# EAGLE board 24dc_cup_wash_sucction - Copyv7.7 (EAGLE 7.7.0)
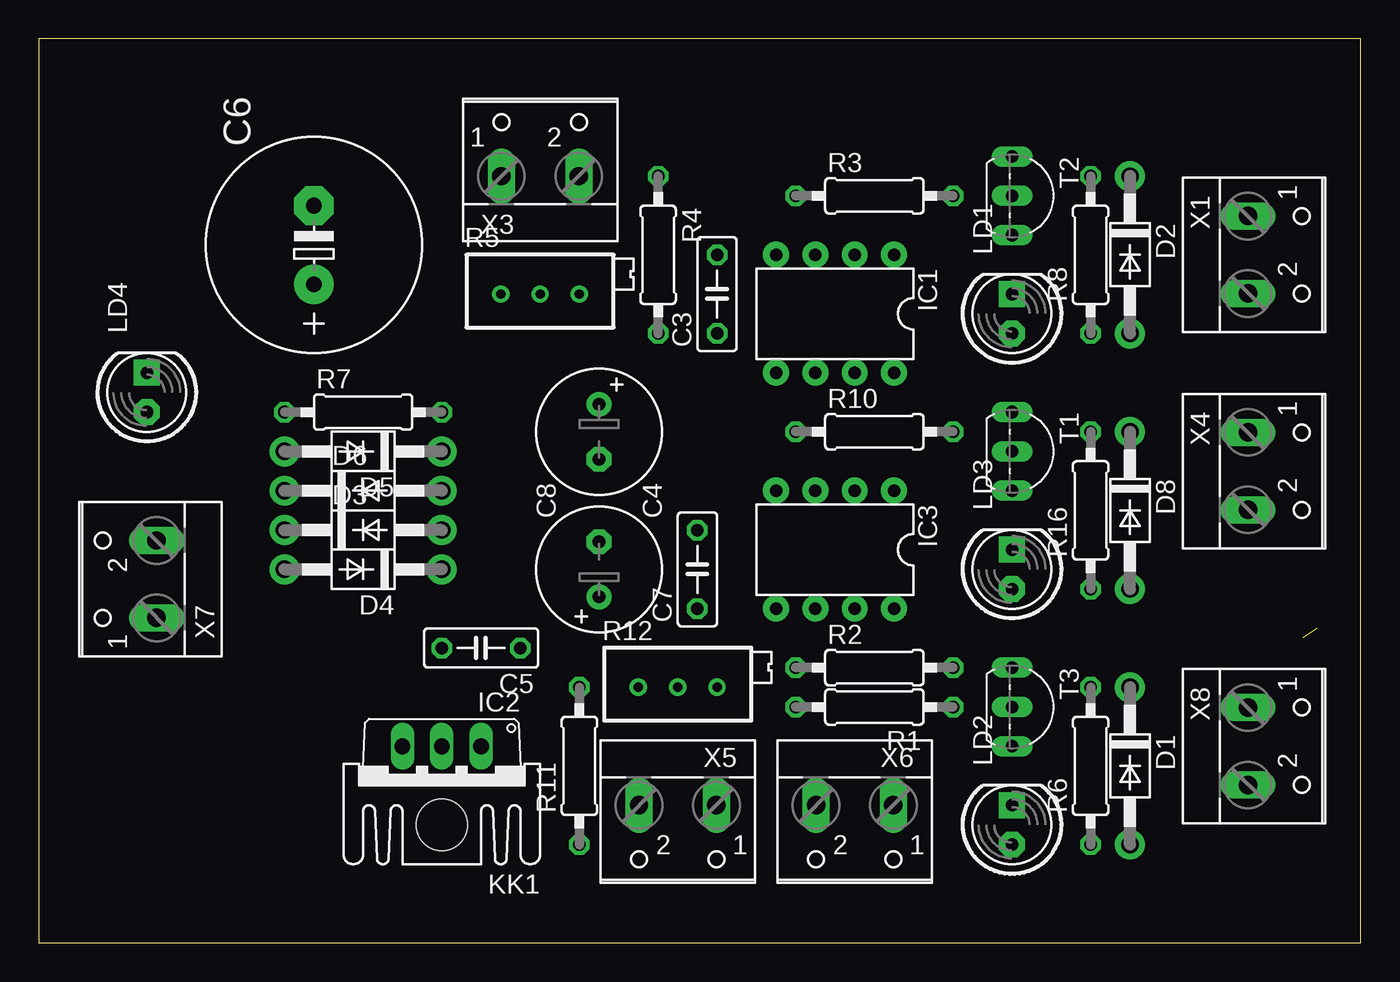
[diagram p0: board, top side]
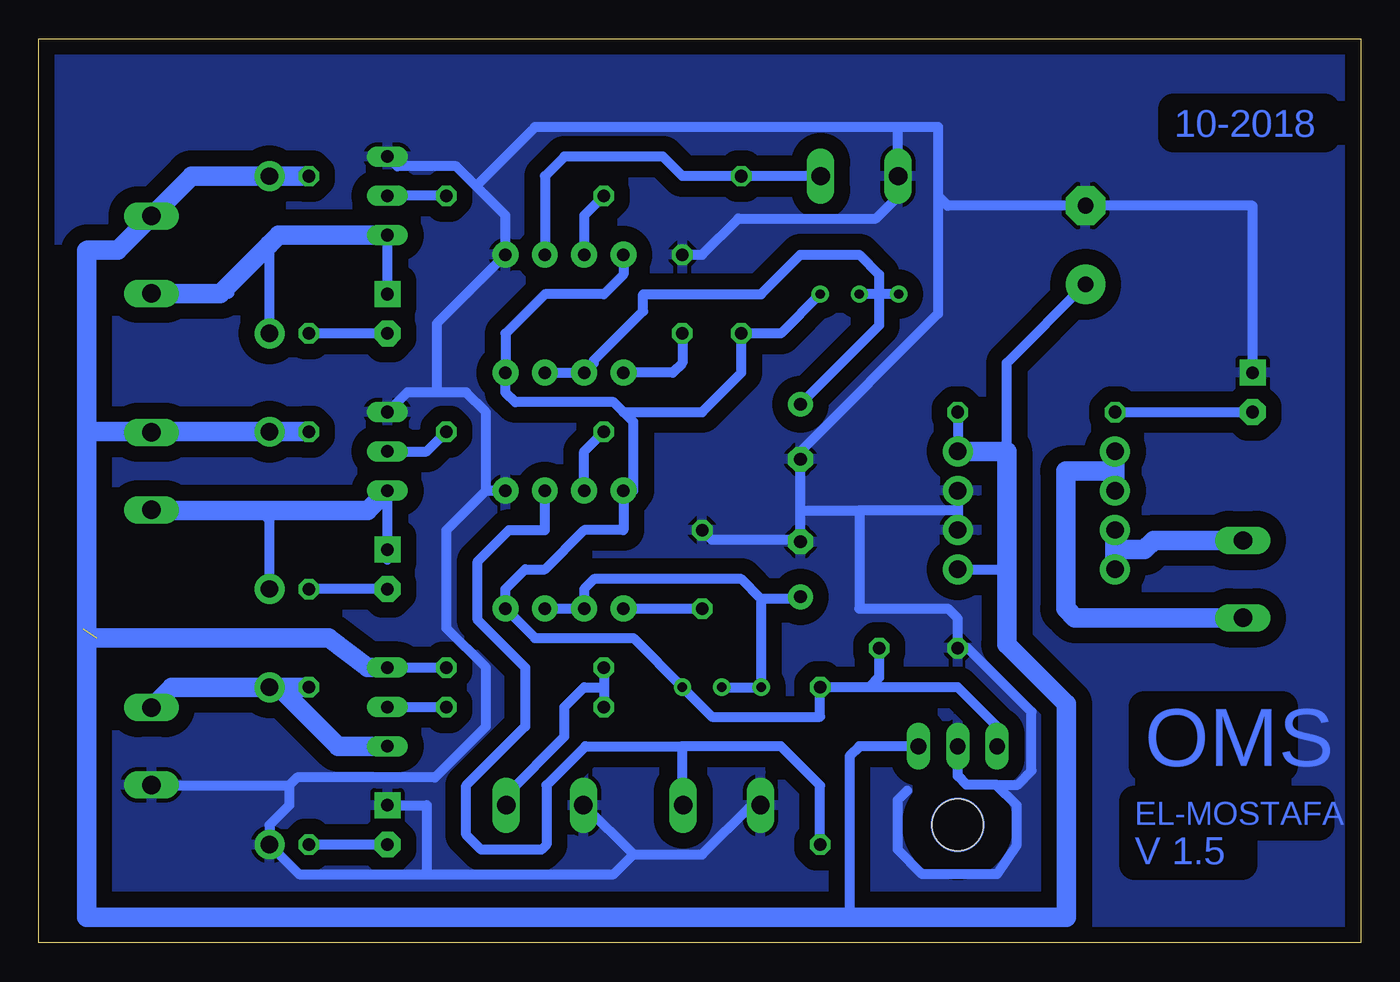
[diagram p1: board, bottom side, seen from below]

Size 85.39 x 58.41 mm. Coordinates in mm from the lower left corner, seen from the top.
Outline: 0,0 85.39,0 85.39,58.41 0,58.41 0,0
Copper layers (1*16): Top 0.035mm / dielectric 1.5mm / Bottom 0.035mm
Design rules "default *": minimum track width 25mil, minimum drill 0.35mm, track to track 40mil, track to pad 40mil, pad to pad 6mil, via to via 6mil, smd to smd 6mil, copper to edge 40mil, drill to drill 6mil, minimum pad ring 10mil, minimum via ring 8mil, stop-mask expansion 4mil, vias tented up to drill 0mil, thermal gap 10mil

## Footprints (pad centres in the part's own frame; a part is rotated, then mirrored left to right if it is on the bottom)
C050-025X075 = drill 0.813 octagon: 1 -2.54,0; 2 2.54,0
E3,5-8 = drill 0.813 pad 1.6: + -1.778,0 | drill 0.813 pad 1.6 octagon: - 1.778,0
E5-13 = drill 1.016 pad 2.54: + -2.54,0 | drill 1.016 pad 2.54 octagon: - 2.54,0
DO41-10 = drill 1.118 pad 1.93: A 5.08,0; C -5.08,0
DIL08-ROUND = drill 0.813 pad 1.676: 1 -3.81,-3.81; 2 -1.27,-3.81; 3 1.27,-3.81; 4 3.81,-3.81; 5 3.81,3.81; 6 1.27,3.81; 7 -1.27,3.81; 8 -3.81,3.81
TO220V = drill 1.016 long: 1 -2.54,-2.54; 2 0,-2.54; 3 2.54,-2.54
SK95-2M3 = hole 3.302: 0,2.54
LED5MM = drill 0.813 pad 1.676 octagon: A -1.27,0 | drill 0.813 pad 1.676 square: K 1.27,0
0207/10 = drill 0.813 octagon: 1 -5.08,0; 2 5.08,0
RTRIMT93XA = drill 0.61: 1 0,-2.54; 2 0,0; 3 0,2.54
TO92-EBC-OVAL = drill 0.813 long: B 0,-1.27; C 2.54,-1.27; E -2.54,-1.27
TO92-EBC = drill 0.813 long: B 0,-1.27; C 2.54,-1.27; E -2.54,-1.27
W237-102 = drill 1.194 long: 1 -2.5,-1.27; 2 2.5,-1.27

## Placement (x,y rotation side)
C3  100nF  [C050-025X075]  43.81,41.91 90 top
C4  100uF  [E3,5-8]  36.2,33.02 270 top
C5  100nF  [C050-025X075]  28.57,19.05 180 top
C6  1000uF 50v  [E5-13]  17.78,45.09 90 top
C7  100nF  [C050-025X075]  42.55,24.13 90 top
C8  100uF  [E3,5-8]  36.2,24.13 90 top
D1  1N5817  [DO41-10]  70.48,11.43 270 top
D2  1N5817  [DO41-10]  70.48,44.45 270 top
D3  1N4007  [DO41-10]  20.95,26.67 0 top
D4  1N4007  [DO41-10]  20.95,24.13 180 top
D5  1N4007  [DO41-10]  20.95,31.75 180 top
D6  1N4007  [DO41-10]  20.95,29.21 0 top
D8  1N5817  [DO41-10]  70.48,27.94 270 top
IC1  NE555N  [DIL08-ROUND]  51.44,40.64 180 top
IC2  7812TV  [TO220V]  26.04,10.16 180 top
IC3  NE555N  [DIL08-ROUND]  51.44,25.4 180 top
KK1  SK95-2M3  [SK95-2M3]  26.04,10.16 180 top
LD1  [LED5MM]  62.87,40.64 90 top
LD2  [LED5MM]  62.87,7.62 90 top
LD3  [LED5MM]  62.87,24.13 90 top
LD4  [LED5MM]  6.99,35.56 90 top
R1  2.2k  [0207/10]  53.98,15.24 180 top
R2  10K  [0207/10]  53.98,17.78 0 top
R3  2.2k  [0207/10]  53.98,48.26 0 top
R4  10K  [0207/10]  40.01,44.45 270 top
R5  100k  [RTRIMT93XA]  32.38,41.91 270 top
R6  10k  [0207/10]  67.94,11.43 90 top
R7  10k  [0207/10]  20.95,34.29 0 top
R8  10k  [0207/10]  67.94,44.45 90 top
R10  2.2k  [0207/10]  53.98,33.02 0 top
R11  10K  [0207/10]  34.92,11.43 90 top
R12  100k  [RTRIMT93XA]  41.27,16.51 270 top
R16  10k  [0207/10]  67.94,27.94 90 top
T1  2N5551  [TO92-EBC-OVAL]  64.14,31.75 270 top
T2  2N5551  [TO92-EBC-OVAL]  64.14,48.26 270 top
T3  2N5401  [TO92-EBC]  64.14,15.24 270 top
X1  [W237-102]  79.38,44.45 270 top
X3  [W237-102]  32.38,50.8 0 top
X4  [W237-102]  79.38,30.48 270 top
X5  [W237-102]  41.27,7.62 180 top
X6  [W237-102]  52.7,7.62 180 top
X7  [W237-102]  6.35,23.5 90 top
X8  [W237-102]  79.38,12.7 270 top

## Library data of the parts
C3-C8 = rcl; SPICEPREFIX: C
D1 D2 D8 T1 T2 = adafruit
D3-D6 IC1 IC3 = adafruit@1
IC2 = linear
KK1 = heatsink
LD1-LD4 = led
R1-R4 R6-R8 R10 R11 R16 = rcl-2
R5 R12 = rcl; SPICEMODEL: X; SPICEPREFIXL: POT
T3 = transistor-neu-to92
X1 X3-X8 = con-wago-500

## Nets
12VDC: C5.1 IC1.4 IC1.8 IC2.3 IC3.4 IC3.8 R4.2 R5.3 R11.2 R12.3
12VDC_IN: C6.+ D2.C D4.C D5.C D8.C IC2.1 R2.2 R7.2 R8.2 R16.2 T3.E X1.1 X4.1
AC1-24: D5.A D6.C X7.1
AC2-24: D3.C D4.A X7.2
CUP: IC1.2 R4.1 X3.2
GND: C3.2 C4.- C5.2 C6.- C7.2 C8.- D1.A D3.A D6.A IC1.1 IC2.2 IC3.1 LD2.K LD4.K T1.E T2.E X3.1 X5.2 X6.2 X8.2
N$1: R3.2 T2.B
N$2: C3.1 IC1.5
N$3: D2.A LD1.K T2.C X1.2
N$5: C7.1 IC3.5
N$6: LD1.A R8.1
N$7: R1.1 T3.B
N$8: LD4.A R7.1
N$9: LD2.A R6.1
N$11: D8.A LD3.K T1.C X4.2
N$12: R10.2 T1.B
N$14: LD3.A R16.1
NS1: D1.C R6.2 T3.C X8.1
OUT_CUP: IC1.3 R3.1
OUT_WASH: IC3.3 R10.1
S_CUP: C4.+ IC1.6 IC1.7 R5.1 R5.2
S_WASH: C8.+ IC3.6 IC3.7 R12.1 R12.2
SUC: R1.2 R2.1 X6.1
WASH: IC3.2 R11.1 X5.1

## Tracks (layer width: path | path; a pad name or v marks a point on that pad's centre or on a via)
12VDC
  Bottom 0.635: 47.62,34.29 46.99,33.66 46.99,29.21 IC3.4 47.62,26.67 50.16,26.67 52.7,24.13 53.98,24.13 55.24,22.86 IC3.8 53.34,19.68 46.99,19.68 R12.3 41.91,14.61 34.92,14.61 R11.2 31.75,16.51 | 47.62,34.29 48.26,34.93 54.61,34.93 55.24,35.56 IC1.8 55.24,39.37 52.7,41.91 48.9,41.91 47.62,43.18 IC1.4 | IC2.3 23.5,13.97 26.04,16.51 31.75,16.51 | R5.3 37.47,39.37 R4.2 40.01,36.83 42.55,34.29 47.62,34.29 | C5.1 31.11,17.14 31.75,16.51
12VDC_IN  (1 unrouted)
  Bottom 0.635: R8.2 D2.C 75.53,49.53 | T3.E R2.2 | R16.2 D8.C 70.53,32.98 X4.1 78.06,33.02 | IC2.1 32.38,12.7 33.02,12.06 33.02,3.81 33.02,3.24 33.02,1.65 | 19.05,3.24 19.05,15.24 22.86,19.05 22.86,24.13 | 22.86,24.13 22.86,31.75 22.86,37.47 C6.+ | D4.C 22.86,24.13 | R7.2 D5.C | 82.23,44.77 82.55,44.45 82.55,33.02 | 82.55,20.32 82.55,33.02 | 78.06,33.02 77.47,33.02 | 78.06,33.02 82.3,33.02 82.55,33.02
  Bottom 1.27: D5.C 22.86,31.75 22.86,19.29 19,15.43 19,1.65 33.02,1.65 82.3,1.65 82.3,33.02 | 82.3,33.02 82.3,44.7 82.23,44.77 80.29,44.77 X1.1 75.53,49.53 R8.2 | T3.E 64.14,17.78 66.67,19.68 81.66,19.68 | 82.3,33.02 R16.2
AC1-24
  Bottom 0.635: D6.C 15.88,30.48 D5.A
  Bottom 1.27: X7.1 18.45,21 19.05,21.59 19.05,30.48 15.88,30.48 | D6.C D5.A
AC2-24
  Bottom 0.635: D3.C 15.88,26.59 15.88,25.4 D4.A
  Bottom 1.27: X7.2 13.38,26 13.97,25.4 15.88,25.4 | D4.A 15.88,26.59
CUP
  Bottom 0.635: IC1.2 52.7,49.53 51.44,50.8 45.09,50.8 43.81,49.53 R4.1 X3.2
GND
  Bottom 0.635: 46.99,5.71 42.55,5.71 39.37,8.89 X5.2 | 46.99,5.71 50.16,8.89 X6.2 | T2.E 62.23,50.17 58.42,50.17 57.15,48.9 | 57.15,48.9 55.24,46.99 IC1.1 59.69,40.01 59.69,35.56 | C7.2 41.91,26.04 36.2,26.04 | 36.2,26.04 36.2,27.94 | 36.2,27.94 C4.- 36.2,31.75 27.3,40.64 27.3,48.26 | 36.2,26.04 C8.- | 36.2,27.94 32.38,27.94 | 57.15,48.9 53.34,52.71 29.84,52.71 | 29.84,52.71 27.3,52.71 27.3,48.26 | 32.38,27.94 32.38,21.59 26.67,21.59 26.04,20.95 C5.2 25.4,19.05 21.27,14.92 21.27,11.11 22.16,10.22 23.56,10.22 | 29.84,52.71 29.89,52.67 X3.1 29.89,48.3 29.84,48.26 31.32,46.79 40.21,46.79 42.55,44.45 C3.2 | 56.52,29.21 59.05,26.67 59.05,20.32 56.52,17.78 56.52,13.97 59.8,10.68 68.69,10.68 69.22,10.16 | 56.52,29.21 IC3.1 | 69.22,10.16 69.22,8.89 70.48,7.62 D1.A 68.58,4.45 60.33,4.45 | 46.99,5.71 48.26,4.45 60.33,4.45 | LD2.K 60.33,8.89 60.33,4.45 | 56.52,29.21 56.52,34.29 57.78,35.56 59.69,35.56 | D6.A 26.04,27.94 | 26.04,27.94 D3.A | 26.04,27.94 32.38,27.94 | X8.2 78.06,10.16 69.22,10.16 | LD4.K 6.99,47.62 C6.- 26.67,47.62 27.3,48.26 | 59.69,35.56 61.59,35.56 T1.E | 29.29,9.84 29.91,9.22 29.91,6.02 28.34,4.45 23.5,4.45 22.23,6.35 22.23,8.89 23.56,10.22 | 23.56,10.22 25.48,10.22 26.04,10.78 IC2.2
  pour Bottom: 0,58.42 85.09,58.42 85.09,0 0,0
N$1
  Bottom 0.635: R3.2 T2.B
N$2
  Bottom 0.635: C3.1 43.81,37.47 44.45,36.83 IC1.5
N$3
  Bottom 0.635: LD1.K T2.C | 73.66,41.95 73.06,41.95 | D2.A 70.48,45.09 70.5,45.11
  Bottom 1.27: T2.C 69.89,45.72 70.5,45.11 73.66,41.95 X1.2
N$5
  Bottom 0.635: IC3.5 C7.1
N$6
  Bottom 0.635: LD1.A R8.1
N$7
  Bottom 0.635: T3.B R1.1
N$8
  Bottom 0.635: R7.1 LD4.A
N$9
  Bottom 0.635: LD2.A R6.1
N$11
  Bottom 0.635: T1.C LD3.K 62.87,24.77 | 75.61,27.98 X4.2 | D8.A 70.48,27.3 71.12,27.94
  Bottom 1.27: T1.C 64.14,27.94 71.12,27.94 78.14,27.94 | 78.74,27.94 78.14,27.94 | 78.14,27.94 X4.2
N$12
  Bottom 0.635: R10.2 60.33,31.75 T1.B
N$14
  Bottom 0.635: LD3.A R16.1
NS1
  Bottom 1.27: T3.C 66.04,12.7 69.85,16.51 | 69.85,16.51 D1.C 76.8,16.51 X8.1 | R6.2 69.85,16.51
OUT_CUP
  Bottom 0.635: R3.1 50.16,46.99 IC1.3
OUT_WASH
  Bottom 0.635: IC3.3 50.16,31.75 R10.1
S_CUP
  Bottom 0.635: IC1.7 IC1.6 49.54,37.45 49.54,37.62 46.35,40.81 46.35,41.91 38.73,41.91 36.2,44.45 32.38,44.45 31.11,43.18 31.11,41.91 | 31.11,41.91 R5.2 | R5.1 31.11,41.91 | 31.11,41.91 31.11,39.88 C4.+
S_WASH
  Bottom 0.635: IC3.7 IC3.6 50.16,22.86 49.53,23.5 40.01,23.5 38.73,22.22 | R12.2 R12.1 38.73,22.22 | 38.73,22.22 36.2,22.22 C8.+
SUC
  Bottom 0.635: R2.1 48.9,16.51 | 48.9,16.51 R1.2 | 48.9,16.51 50.16,16.51 51.44,15.24 51.44,13.32 55.24,9.51 55.24,8.89 X6.1
WASH
  Bottom 0.635: R11.1 34.92,10.16 37.47,12.7 43.81,12.7 | 43.77,10.2 X5.1 43.81,8.93 43.81,12.7 | IC3.2 52.7,26.67 55.02,26.67 57.04,24.65 57.04,20.85 56.52,20.33 56.52,20.32 53.98,17.78 53.98,13.97 57.78,10.16 57.78,6.98 56.82,6.02 52.93,6.02 52.6,6.35 52.6,10.19 50.08,12.7 43.81,12.7
(copper drawn outside any net)
  shapes: Bottom circle x1

## Text on the board
Bottom: 10-2018 | OMS | EL-MOSTAFA | V 1.5